# Altium PCB PCB.PcbDoc (part 2 of 2)
Units mm, origin at the board's own origin, x right, y up, seen from the top; angles counter-clockwise.
Board outline 82.77 x 70.07 mm, 4 copper layers (Top Layer, InternalPlane1, InternalPlane2, Bottom Layer), stack 1.963 mm thick; 175 components, 121 nets, 576 pads, 458 vias.
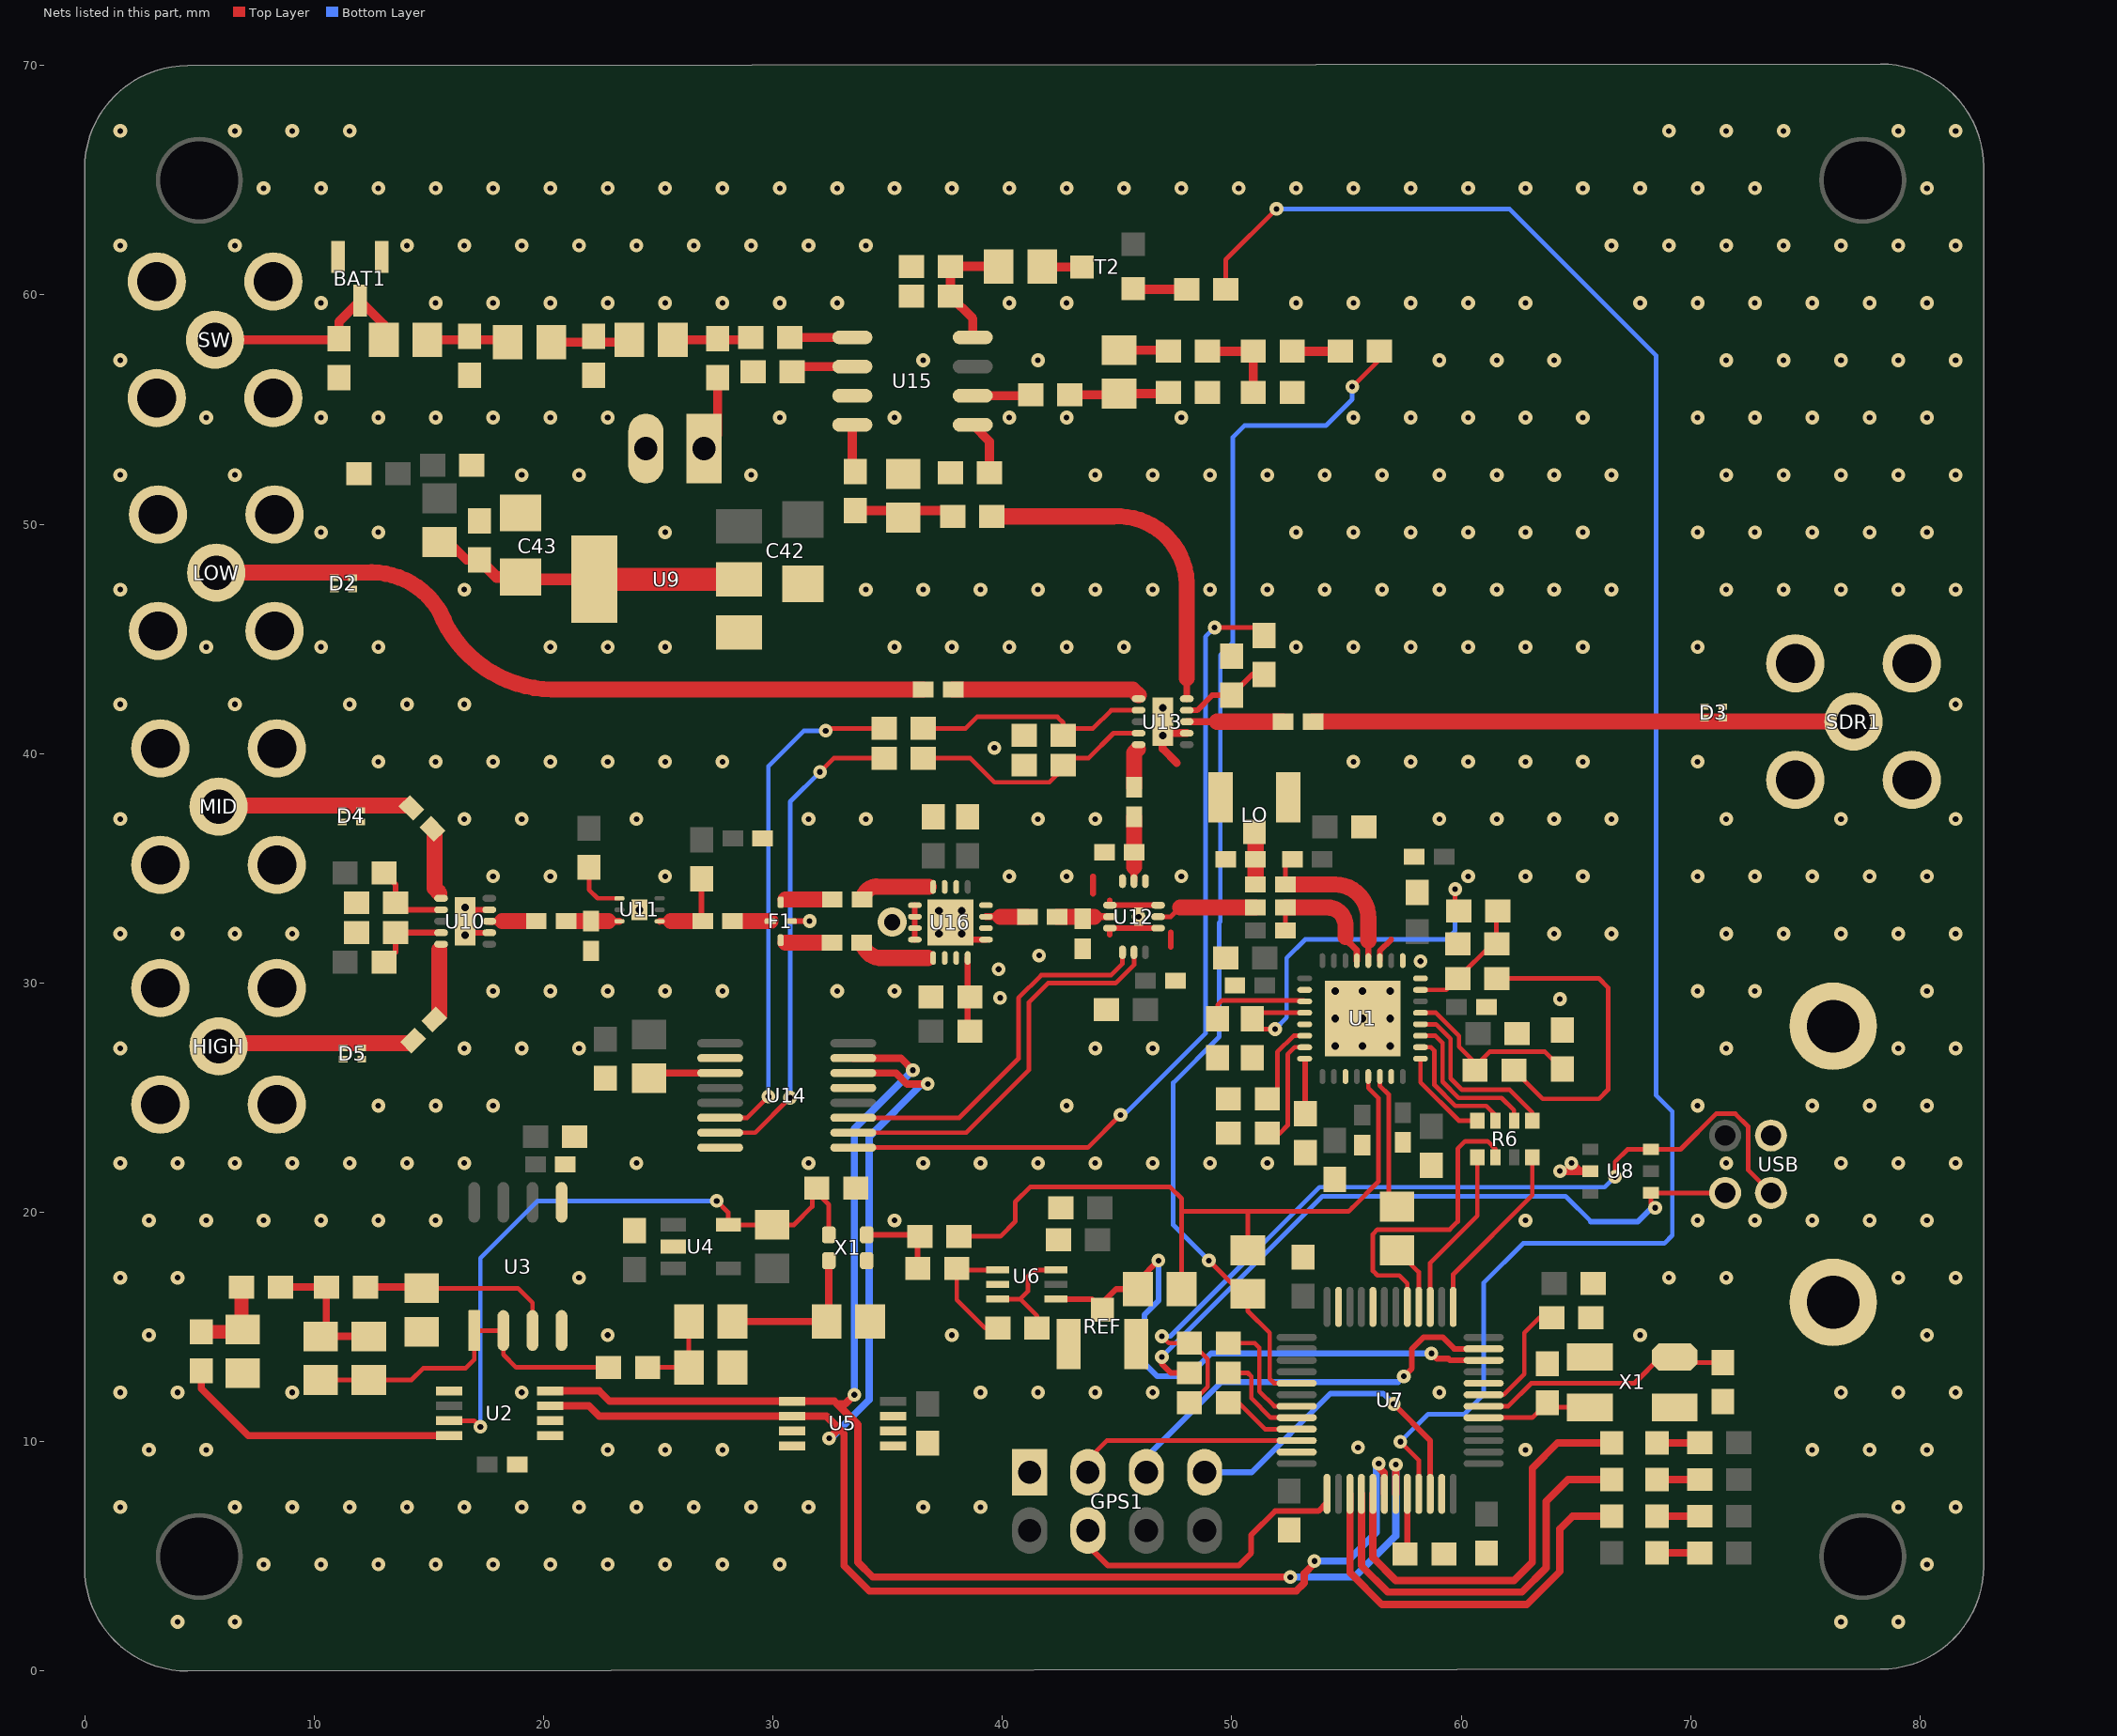
[diagram p4: the nets of this part, all layers, seen from the top]

## Via types
v1: diameter 0.6, hole 0.25, Top Layer to Bottom Layer, 439 vias
v2: diameter 0.66, hole 0.33, Top Layer to Bottom Layer, tented top, 18 vias
v3: diameter 1.27, hole 0.711, Top Layer to Bottom Layer, 1 vias

## Nets (pads, with @x,y where several pads share a name; then routed paths per layer and width w, separated by ;. In a path a pad name is that pad's centre, name@x,y a point inside that pad or via, vN(x,y) a via of type N, cw(c..) or ccw(c..) an arc to the next point about the centre after c; other vN are vias at no path point) (continued)
GND: BAT1.1 BAT1.2 C1.1 C2.1 C3.1 C4.1 C5.1 C6.1 C7.1 C8.1 C9.1 C10.1 C11.1 C12.1 C13.1 C14.1 C15.1 C18.1 C20.1 C22.1 C23.1 C25.1 C26.1 C27.1 C28.1 C29.1 C31.1 C32.1 C33.1 C35.1 C36.1 C37.1 C38.1 C39.1 C40.1 C41.1 C42.2 C43.2 C44.1 C45.1 C47.1 C49.1 C50.1 C51.1 C54.1 C60.1 C61.1 C62.1 C64.1 C65.1 C68.1 C69.2 C70.1 C71.1 C72.1 C73.1 C74.1 C78.1 C79.1 C80.2 C82.1 C85.1 C86.1 D2.1 D2.2 D3.1 D3.2 D4.1 D4.2 D5.1 D5.2 F1.4 GPS1.1 HIGH.2 HIGH.3 HIGH.4 HIGH.5 L9.1 LO.0 LOW.2 LOW.3 LOW.4 LOW.5 MID.2 MID.3 MID.4 MID.5 R1.1 R9.1 R23.1 R35.1 R37.2 R38.2 R39.1 REF.0 SDR1.2 SDR1.3 SDR1.4 SDR1.5 SW.2 SW.3 SW.4 SW.5 TERM1.2 U1.8 U1.9 U1.11 U1.18 U1.21 U1.27 U1.31 U1.33 U2.1 U2.2 U2.5 U3.4 U3.5 U4.2 U5.3 U5.4 U5.5 U5.6 U5.7 U6.2 U7.8 U7.20 U7.23 U7.35 U7.47 U8.2 U9.1 U10.7 U10.9 U10.11 U11.7 U12.1 U12.3 U12.4 U12.6 U12.10 U12.12 U12.13 U13.7 U13.11 U14.2 U14.8 U14.13 U15.3 U16.1 U16.2 U16.4 U16.6 U16.7 U16.9 U16.10 U16.11 U16.12 U16.14 U16.15 U16.17 USB.4 USB.5 USB.6 X1.2 X1.4@69.3,11.5 | length 18.3
  Top Layer w0.25: U10.11@16.586,32.692 17.086,33.192 U10.9@17.636,33.192 ; 17.086,32.192 U10.7@17.636,32.192 ; F1.4@30.786,32.692 31.592,32.692 v1(31.6,32.7) ; U16.12@36.186,31.892 U16.11@36.186,32.392 U16.10@36.186,32.892 U16.9@36.186,33.392 ; U16.17@38.486,31.892 U16.1@39.286,31.892 ; 43.95,33.9 43.95,34.65 ; 44.686,32.114 U12.6@44.686,32.392 U12.10@46.786,32.392 ; 44.686,33.6 U12.4@44.686,33.392 U12.12@46.786,33.392 ; 47.342,31.581 47.342,32.208 ; U1.11@56.45,30.975 56.45,31.4 56.95,31.9
  Top Layer w0.35: v2(46.986,41.992) U13.11@46.986,41.392 ; 47.6,39.6 46.986,40.214 v2(46.986,40.792) U13.11@46.986,41.392 ; U13.7@48.036,40.892 47.486,40.892 U13.11@46.986,41.392 ; v1(64.3,21.8) U8.2@65.625,21.8 65.15,21.8 v1(64.8,22.15)
  other v1: 4.05,2.15 6.55,2.15 76.55,2.15 79.05,2.15 7.8,4.65 10.3,4.65 12.8,4.65 15.3,4.65 17.8,4.65 20.3,4.65 22.8,4.65 25.3,4.65 27.8,4.65 30.3,4.65 80.3,4.65 1.55,7.15 6.55,7.15 9.05,7.15 11.55,7.15 14.05,7.15 16.55,7.15 19.05,7.15 21.55,7.15 24.05,7.15 26.55,7.15 29.05,7.15 31.55,7.15 36.55,7.15 39.05,7.15 79.05,7.15 81.55,7.15 2.8,9.65 5.3,9.65 22.8,9.65 25.3,9.65 27.8,9.65 62.8,9.65 75.3,9.65 77.8,9.65 80.3,9.65 55.5,9.75 1.55,12.15 4.05,12.15 9.05,12.15 19.05,12.15 39.05,12.15 41.55,12.15 44.05,12.15 46.55,12.15 59.05,12.15 76.55,12.15 79.05,12.15 81.55,12.15 2.8,14.65 22.8,14.65 37.8,14.65 67.8,14.65 80.3,14.65 1.55,17.15 4.05,17.15 21.55,17.15 69.05,17.15 71.55,17.15 79.05,17.15 81.55,17.15 2.8,19.65 5.3,19.65 7.8,19.65 10.3,19.65 12.8,19.65 15.3,19.65 35.3,19.65 62.8,19.65 70.3,19.65 72.8,19.65 75.3,19.65 77.8,19.65 80.3,19.65 1.55,22.15 4.05,22.15 6.55,22.15 9.05,22.15 11.55,22.15 14.05,22.15 16.55,22.15 24.05,22.15 31.55,22.15 36.55,22.15 39.05,22.15 41.55,22.15 44.05,22.15 46.55,22.15 49.05,22.15 51.55,22.15 71.55,22.15 76.55,22.15 79.05,22.15 81.55,22.15 12.8,24.65 15.3,24.65 17.8,24.65 42.8,24.65 70.3,24.65 75.3,24.65 77.8,24.65 80.3,24.65 1.55,27.15 16.55,27.15 19.05,27.15 21.55,27.15 44.05,27.15 46.55,27.15 71.55,27.15 79.05,27.15 81.55,27.15 64.3,29.3 39.9,29.35 17.8,29.65 20.3,29.65 22.8,29.65 25.3,29.65 27.8,29.65 32.8,29.65 35.3,29.65 70.3,29.65 72.8,29.65 80.3,29.65 39.836,30.6 58.225,30.95 41.6,31.2 1.55,32.15 4.05,32.15 6.55,32.15 9.05,32.15 64.05,32.15 66.55,32.15 71.55,32.15 74.05,32.15 76.55,32.15 79.05,32.15 81.55,32.15 45.936,32.892 17.8,34.65 20.3,34.65 25.3,34.65 40.3,34.65 42.8,34.65 47.8,34.65 60.3,34.65 62.8,34.65 65.3,34.65 70.3,34.65 72.8,34.65 75.3,34.65 77.8,34.65 80.3,34.65 1.55,37.15 16.55,37.15 19.05,37.15 24.05,37.15 31.55,37.15 34.05,37.15 41.55,37.15 44.05,37.15 59.05,37.15 61.55,37.15 64.05,37.15 66.55,37.15 71.55,37.15 76.55,37.15 81.55,37.15 12.8,39.65 15.3,39.65 17.8,39.65 20.3,39.65 22.8,39.65 25.3,39.65 27.8,39.65 55.3,39.65 57.8,39.65 60.3,39.65 62.8,39.65 65.3,39.65 70.3,39.65 39.65,40.25 1.55,42.15 6.55,42.15 11.55,42.15 14.05,42.15 16.55,42.15 81.55,42.15 5.3,44.65 10.3,44.65 12.8,44.65 20.3,44.65 22.8,44.65 25.3,44.65 35.3,44.65 37.8,44.65 40.3,44.65 42.8,44.65 45.3,44.65 52.8,44.65 55.3,44.65 57.8,44.65 60.3,44.65 62.8,44.65 65.3,44.65 70.3,44.65 1.55,47.15 16.55,47.15 34.05,47.15 36.55,47.15 39.05,47.15 41.55,47.15 44.05,47.15 46.55,47.15 49.05,47.15 51.55,47.15 54.05,47.15 56.55,47.15 59.05,47.15 61.55,47.15 64.05,47.15 66.55,47.15 71.55,47.15 74.05,47.15 76.55,47.15 79.05,47.15 81.55,47.15 10.3,49.65 12.8,49.65 25.3,49.65 52.8,49.65 55.3,49.65 57.8,49.65 60.3,49.65 62.8,49.65 65.3,49.65 70.3,49.65 72.8,49.65 75.3,49.65 77.8,49.65 80.3,49.65 1.55,52.15 6.55,52.15 19.05,52.15 21.55,52.15 29.05,52.15 44.05,52.15 46.55,52.15 49.05,52.15 51.55,52.15 54.05,52.15 56.55,52.15 59.05,52.15 61.55,52.15 64.05,52.15 66.55,52.15 71.55,52.15 74.05,52.15 76.55,52.15 79.05,52.15 81.55,52.15 5.3,54.65 10.3,54.65 12.8,54.65 15.3,54.65 17.8,54.65 20.3,54.65 22.8,54.65 30.3,54.65 35.3,54.65 40.3,54.65 42.8,54.65 47.8,54.65 55.3,54.65 57.8,54.65 60.3,54.65 62.8,54.65 65.3,54.65 70.3,54.65 72.8,54.65 75.3,54.65 77.8,54.65 80.3,54.65 1.55,57.15 36.55,57.15 41.55,57.15 59.05,57.15 61.55,57.15 64.05,57.15 71.55,57.15 74.05,57.15 76.55,57.15 79.05,57.15 81.55,57.15 10.3,59.65 15.3,59.65 17.8,59.65 20.3,59.65 22.8,59.65 25.3,59.65 27.8,59.65 30.3,59.65 32.8,59.65 40.3,59.65 42.8,59.65 52.8,59.65 55.3,59.65 57.8,59.65 60.3,59.65 62.8,59.65 67.8,59.65 70.3,59.65 72.8,59.65 75.3,59.65 77.8,59.65 80.3,59.65 1.55,62.15 6.55,62.15 14.05,62.15 16.55,62.15 19.05,62.15 21.55,62.15 24.05,62.15 26.55,62.15 29.05,62.15 31.55,62.15 34.05,62.15 66.55,62.15 69.05,62.15 71.55,62.15 74.05,62.15 76.55,62.15 79.05,62.15 81.55,62.15 7.8,64.65 10.3,64.65 12.8,64.65 15.3,64.65 17.8,64.65 20.3,64.65 22.8,64.65 25.3,64.65 27.8,64.65 30.3,64.65 32.8,64.65 35.3,64.65 37.8,64.65 40.3,64.65 42.8,64.65 45.3,64.65 47.8,64.65 50.3,64.65 52.8,64.65 55.3,64.65 57.8,64.65 60.3,64.65 62.8,64.65 65.3,64.65 67.8,64.65 70.3,64.65 72.8,64.65 80.3,64.65 1.55,67.15 6.55,67.15 9.05,67.15 11.55,67.15 69.05,67.15 71.55,67.15 74.05,67.15 79.05,67.15 81.55,67.15
  other v2: 54.5,27.25 55.7,27.25 56.9,27.25 54.5,28.45 55.7,28.45 56.9,28.45 54.5,29.65 55.7,29.65 56.9,29.65 16.586,32.092 37.236,32.142 38.236,32.142 37.236,33.142 38.236,33.142 24.186,33.192 16.586,33.292
  other v3: 35.2,32.65
GPS_RST: GPS1.7 U7.46 | length 14.4
  Top Layer w0.25: v1(57.05,11.65) 58.65,10.05 U7.46@58.65,7.725
  Bottom Layer w0.25: GPS1.7@48.81,8.67 50.87,8.67 54.3,12.1 56.6,12.1 v1(57.05,11.65)
LO+: C16.2 U12.11 | length 4.4
  Top Layer w0.2: U12.11@46.786,32.892 47.342,32.892 47.75,33.3
  Top Layer w0.7: 47.75,33.3 51.028,33.3 C16.2@51.036,33.292
LO-: C17.2 LO.1 R9.2 | length 2.3
  Top Layer w0.7: LO.1@50.986,36.59 51.036,36.54 C17.2@51.036,34.292
MIX_EN: U12.7 U14.11 | length 16.6
  Top Layer w0.2: U14.11@33.5,24.125 38.125,24.125 40.7,26.7 40.7,29.35 41.692,30.342 44.736,30.342 45.236,30.842 U12.7@45.236,31.342
MIX_X2: U12.8 U14.10 | length 17.5
  Top Layer w0.2: U14.10@33.5,23.475 38.425,23.475 41.15,26.2 41.15,29.15 41.992,29.992 44.936,29.992 45.736,30.792 U12.8@45.736,31.342
MOSI: R6.3 U7.17 | length 13.7
  Top Layer w0.2: U7.17@57.65,15.875 57.65,16.9 57.3,17.25 56.35,17.25 56.15,17.45 56.15,19.054 56.346,19.25 59.5,19.25 59.85,19.6 59.85,22.778 60.172,23.1 61.15,23.1 61.5,22.75 R6.3@61.5,22.4
MUXOUT: R3.1 U7.16 | length 2.9
  Top Layer w0.2: R3.1@57.2,18.35 58.15,17.4 U7.16@58.15,15.875
NetBAT1_3: BAT1.3 L6.2 R35.2 SW.1 | length 9.5
  Top Layer w0.4: SW.1@5.686,58.042 R35.2@11.036,58.042 ; R35.2@11.086,58.092 11.086,58.836 BAT1.3@12,59.75 13.036,58.714 L6.2@13.036,58.042
NetC7_2: C7.2 U1.23 | length 5
  Top Layer w0.2: C7.2@51.55,23.45 52.094,23.45 52.436,23.792 52.436,26.892 52.744,27.2 U1.23@53.175,27.2
NetC14_2: C14.2 U1.19 | length 4.5
  Top Layer w0.2: C14.2@49.386,28.442 49.386,29.042 49.586,29.242 53.133,29.242 U1.19@53.175,29.2
NetC15_2: C15.2 U1.24 | length 2.4
  Top Layer w0.25: U1.24@53.175,26.7 53.2,26.675 C15.2@53.2,24.3
NetC16_1: C16.1 R4.1 U1.13 | length 5.8
  Top Layer w0.2: R4.1@52.336,32.292 C16.1@52.336,33.292
  Top Layer w0.3: 54.95,32 54.95,31.931 55.45,31.431 U1.13@55.45,30.975
  Top Layer w0.7: C16.1@52.336,33.292 54.15,33.292 cw(c54.179,32.521) 54.95,32.55 54.95,32
NetC17_1: C17.1 R5.1 U1.12 | length 7.3
  Top Layer w0.2: C17.1@52.336,34.292 52.336,35.092 R5.1@52.636,35.392
  Top Layer w0.25: U1.12@55.95,31.175 55.95,31.85
  Top Layer w0.7: C17.1@52.336,34.292 54.5,34.292 ; 54.495,34.292 cw(c54.5,32.842) 55.95,32.847 ; 55.95,31.85 55.95,32.842
NetC18_2: C18.2 C19.2 R10.1 U1.7 | length 5.7
  Top Layer w0.2: U1.7@58.225,29.7 59.35,29.7 C19.2@59.85,30.2 61.35,31.7 C18.2@61.55,31.7 61.536,31.714 R10.1@61.536,33.192
NetC19_1: C19.1 R11.2 | length 14.2
  Top Layer w0.2: C19.1@61.55,30.2 66,30.2 66.4,29.8 66.4,25.35 66,24.95 63.55,24.95 R11.2@62.3,26.2
NetC21_1: C21.1 C24.1 R13.1 U3.1 U3.2 | length 15.5
  Top Layer w0.2: C21.1@10.286,12.692 C24.1@12.386,12.692 14.242,12.692 14.75,13.2 16.6,13.2 16.981,13.581 U3.1@16.981,14.848 U3.2@18.251,14.848 18.251,13.799 18.808,13.242 R13.1@22.836,13.242
NetC21_2: C21.2 C24.2 R15.2 R16.1 | length 6.4
  Top Layer w0.32: R15.2@8.536,16.742 R16.1@10.536,16.742 10.536,14.842 C21.2@10.286,14.592 C24.2@12.386,14.592
NetC25_2: C25.2 L1.1 R13.2 | length 3.8
  Top Layer w0.2: R13.2@24.536,13.242 C25.2@26.336,13.242 L1.1@26.336,15.242
NetC26_2: C26.2 L1.2 X1.1@32.436,17.892 | length 6.8
  Top Layer w0.32: L1.2@28.236,15.242 C26.2@32.336,15.242 32.436,15.342 X1.1@32.436,17.892
NetC27_2: C27.2 R14.2 R15.1 | length 3.7
  Top Layer w0.6: R14.2@5.086,14.792 6.786,14.792 6.836,14.842 R15.1@6.836,16.742
NetC28_2: C28.2 R16.2 U3.3 | length 8.8
  Top Layer w0.2: C28.2@14.686,16.692 18.886,16.692 19.521,16.057 U3.3@19.521,14.848
  Top Layer w0.32: R16.2@12.236,16.742 14.636,16.742 C28.2@14.686,16.692
NetC30_1: C30.1 R17.1 U6.1 | length 5.5
  Top Layer w0.2: U6.1@39.791,17.492 38.076,17.492 C30.1@38.011,17.557 38.011,16.19 39.244,14.957 R17.1@39.811,14.957
NetC30_2: C30.2 C34.1 X1.3@34.086,19.022 | length 3.7
  Top Layer w0.25: X1.3@34.086,19.022 C34.1@36.346,19.022 ; C30.2@36.311,17.557 C34.1@36.311,18.857 ; C34.1@36.311,18.957 C34.1@36.411,18.957
NetC39_2: C39.2 U7.5 X1.3@65.6,11.5 | length 4.8
  Top Layer w0.2: U7.5@60.975,11.05 63.1,11.05 63.55,11.5 X1.3@65.6,11.5
NetC40_2: C40.2 U7.6 X1.1@69.3,13.7 | length 10.8
  Top Layer w0.2: U7.6@60.975,11.55 62.05,11.55 63.05,12.55 67.55,12.55 X1.1@68.7,13.7 ; X1.1@69.3,13.7 69.55,13.45 C40.2@71.4,13.45
NetC41_2: C41.2 U7.7 | length 5.4
  Top Layer w0.2: U7.7@60.975,12.05 61.85,12.05 62.75,12.95 62.75,14.75 63.4,15.4 C41.2@63.95,15.4
NetC43_1: C43.1 C44.2 L2.1 U9.2 U9.4 | length 13.7
  Top Layer w0.4: L2.1@15.475,49.225 15.875,49.225 16.65,48.45 C44.2@17.2,48.45
  Top Layer w0.5: C44.2@17.2,48.45 17.95,47.7 C43.1@19,47.7 19.1,47.6 U9.4@22.219,47.6
  Top Layer w1: U9.4@22.219,47.6 U9.2@28.518,47.6
NetC52_1: C52.1 U10.5 | length 2.9
  Top Layer w0.7: C52.1@15.45,28.6 15.45,31.456
NetC52_2: C52.2 D5.3 D5.4 HIGH.1 | length 8.3
  Top Layer w0.7: HIGH.1@5.836,27.242 5.976,27.382 C52.2@14.046,27.382
NetC53_1: C53.1 F1.1 | length 2
  Top Layer w0.7: 30.55,33.642 C53.1@32.586,33.642
NetC53_2: C53.2 U16.8 | length 3.1
  Top Layer w0.7: C53.2@33.942,33.708 cw(c34.517,33.625) 34.6,34.2 36.8,34.2
NetC55_1: C55.1 U10.8 | length 2.1
  Top Layer w0.3: U10.8@17.636,32.692 18.205,32.692
  Top Layer w0.7: 18.205,32.692 C55.1@19.686,32.692
NetC55_2: C55.2 C60.2 U11.3 | length 2.3
  Top Layer w0.3: 22.836,32.7 22.844,32.692 U11.3@23.311,32.692
  Top Layer w0.7: C55.2@20.986,32.692 20.994,32.7 22.836,32.7
NetC56_1: C56.1 L4.1 U11.4 | length 3.7
  Top Layer w0.25: L4.1@26.886,34.542 26.886,32.742 C56.1@26.936,32.692
  Top Layer w0.3: U11.4@25.061,32.692 25.55,32.7
  Top Layer w0.7: 25.55,32.7 C56.1@26.936,32.692
NetC56_2: C56.2 F1.2 | length 1.7
  Top Layer w0.7: C56.2@28.236,32.692 F1.2@29.886,32.692
NetC57_1: C57.1 F1.3 | length 2
  Top Layer w0.7: 30.55,31.75 C57.1@32.536,31.75
NetC57_2: C57.2 U16.13 | length 3.4
  Top Layer w0.7: C57.2@33.897,31.699 ccw(c34.744,31.978) 34.884,31.098 ; 34.65,31.092 36.75,31.092
NetC58_1: C58.1 U16.3 | length 1.8
  Top Layer w0.3: U16.3@39.286,32.892 39.908,32.892
  Top Layer w0.7: 39.908,32.892 C58.1@41.086,32.892
NetC58_2: C58.2 C62.2 U12.5 | length 2.3
  Top Layer w0.3: 44,32.892 U12.5@44.686,32.892
  Top Layer w0.7: C58.2@42.386,32.892 44,32.892
NetC59_1: C59.1 C61.2 U12.2 | length 2.8
  Top Layer w0.3: U12.2@45.736,34.442 45.736,35.064
  Top Layer w0.7: 45.736,35.064 C59.1@45.736,37.242
NetC59_2: C59.2 U13.5 | length 1.7
  Top Layer w0.7: C59.2@45.736,38.542 45.736,40.036 45.9,40.2
NetC63_1: C63.1 U10.1 | length 2.7
  Top Layer w0.7: C63.1@15.25,36.55 15.25,34.128 15.464,33.914
NetC63_2: C63.2 D4.3 D4.4 MID.1 | length 8.3
  Top Layer w0.7: MID.1@5.836,37.692 5.876,37.732 C63.2@14.15,37.732
NetC64_2: C64.2 R8.2 U10.2 | length 3.6
  Top Layer w0.25: R8.2@13.05,34.8 13.55,34.3 C64.2@13.55,33.5 13.858,33.192 U10.2@15.536,33.192
NetC65_2: C65.2 R27.1 U10.4 | length 3.7
  Top Layer w0.25: R27.1@12.85,30.9 13.1,30.9 13.55,31.35 C65.2@13.55,32.2 15.528,32.2 U10.4@15.536,32.192
NetC66_1: C66.1 D2.3 D2.4 LOW.1 | length 33.6
  Top Layer w0.7: LOW.1@5.736,47.892 12.208,47.892 cw(c12.483,44.425) 15.657,45.848 ; 15.503,46.128 ccw(c20.475,48.167) 20.75,42.8 ; 20.35,42.8 C66.1@36.55,42.8
NetC66_2: C66.2 U13.1 | length 8.2
  Top Layer w0.7: C66.2@37.85,42.8 45.678,42.8 45.936,42.542
NetC67_1: C67.1 U13.8 | length 4.2
  Top Layer w0.3: U13.8@48.036,41.392 49.358,41.392
  Top Layer w0.7: 49.358,41.392 C67.1@52.236,41.392
NetC67_2: C67.2 D3.3 D3.4 SDR1.1 | length 24.4
  Top Layer w0.7: C67.2@53.536,41.392 53.544,41.4 SDR1.1@77.925,41.4
NetC70_2: C70.2 R28.2 U13.4 | length 11.2
  Top Layer w0.2: R28.2@36.55,39.8 38.6,39.8 39.65,38.75 42.05,38.75 42.65,39.35 42.65,39.792 42.65,39.8 43.75,39.8 44.842,40.892 U13.4@45.936,40.892
  Top Layer w0.25: C70.2@42.4,39.792 C70.2@42.65,39.792
NetC71_2: C71.2 R30.2 U13.2 | length 10.3
  Top Layer w0.2: R30.2@36.55,41.1 38.4,41.1 38.9,41.6 42.4,41.6 42.65,41.35 42.65,41.1 43.95,41.1 44.742,41.892 U13.2@45.936,41.892
NetC72_2: C72.2 R32.2 U13.9 | length 4
  Top Layer w0.25: U13.9@48.036,41.892 48.492,41.892 49.15,42.55 C72.2@50,42.55 50.9,43.45 R32.2@51.4,43.45
NetC73_2: C73.2 C74.2 L5.1 U15.8 | length 5.6
  Top Layer w0.4: U15.8@38.711,58.147 38.711,58.967 C73.2@37.736,59.942 C74.2@37.736,61.242 L5.1@39.836,61.242
NetC75_1: C75.1 U15.1 | length 2.7
  Top Layer w0.4: C75.1@30.736,58.142 33.456,58.142 U15.1@33.461,58.147
NetC75_2: C75.2 L8.1 R34.2 | length 3.4
  Top Layer w0.4: L8.1@25.636,58.042 28.936,58.042 C75.2@29.036,58.142
NetC76_1: C76.1 U15.4 | length 2.1
  Top Layer w0.4: U15.4@33.461,54.337 33.461,52.417 C76.1@33.586,52.292
NetC76_2: C76.2 C77.1 L9.2 | length 4.4
  Top Layer w0.4: C76.2@33.586,50.592 37.586,50.592 C77.1@37.836,50.342
NetC77_2: C77.2 U13.10 | length 15.2
  Top Layer w0.3: U13.10@48.036,42.392 48.036,43.286
  Top Layer w0.7: C77.2@39.536,50.342 44.842,50.342 cw(c45.018,47.324) 48.036,47.5 48.036,43.286
NetC78_2: C78.2 L6.1 L7.2 | length 3.5
  Top Layer w0.4: L6.1@14.936,58.042 18.336,58.042 L7.2@18.436,57.942
NetC79_2: C79.2 L7.1 L8.2 | length 3.4
  Top Layer w0.4: L7.1@20.336,57.942 23.636,57.942 L8.2@23.736,58.042
NetC80_1: C80.1 U15.2 | length 2.7
  Top Layer w0.4: C80.1@30.836,56.642 31.071,56.877 U15.2@33.461,56.877
NetC81_1: C81.1 U15.6 | length 2.5
  Top Layer w0.4: U15.6@38.711,55.607 41.201,55.607 C81.1@41.236,55.642
NetC81_2: C81.2 L10.1 R38.1 | length 4.3
  Top Layer w0.4: C81.2@42.936,55.642 45.036,55.642 L10.1@45.086,55.692 47.186,55.692 R38.1@47.236,55.742
NetC82_2: C82.2 U15.5 | length 2.4
  Top Layer w0.4: U15.5@38.711,54.337 39.436,53.612 C82.2@39.436,52.242
NetC83_1: C83.1 R36.2 | length 2.1
  Top Layer w0.4: R36.2@52.636,57.542 C83.1@54.736,57.542
NetC83_2: C83.2 R2.2 U7.29 | length 53.4
  Top Layer w0.2: v1(49,17.9) 50.45,16.45 R2.2@50.7,16.45 50.7,15.7 51.65,14.75 51.65,12.75 51.85,12.55 U7.29@52.825,12.55 ; v1(55.25,56) C83.2@56.436,57.186
  Bottom Layer w0.2: v1(49,17.9) 47.45,19.45 47.45,25.65 49.45,27.65 49.45,32.628 49.5,32.678 49.5,44.3 50.05,44.85 50.05,53.8 50.55,54.3 54.1,54.3 55.25,55.45 v1(55.25,56)
NetC84_1: C84.1 L10.2 | length 2.2
  Top Layer w0.4: L10.2@45.086,57.592 47.186,57.592 C84.1@47.236,57.542
NetC84_2: C84.2 R36.1 R37.1 | length 3.8
  Top Layer w0.4: C84.2@48.936,57.542 R36.1@50.936,57.542 R37.1@50.936,55.742
NetC86_2: C86.2 R7.2 U16.16 | length 3.2
  Top Layer w0.25: U16.16@38.486,31.092 38.486,27.992 R7.2@38.586,27.892
NetCLK_1: CLK.1 R19.1 | length 1.9
  Top Layer w0.32: CLK.1@68.537,5.154 R19.1@70.396,5.154
NetDATA1_2: R25.2 U8.4 USB.2@71.5,20.85 | length 30.7
  Top Layer w0.2: v1(68.45,20.2) 68.275,20.375 U8.4@68.275,20.85 USB.2@71.5,20.85
  Top Layer w0.25: v1(46.95,13.7) 46.95,13.4 47.35,13 R25.2@48.15,13
  Bottom Layer w0.2: v1(46.95,13.7) 53.95,20.7 64.55,20.7 65.65,19.6
  Bottom Layer w0.25: 65.65,19.6 67.7,19.6 v1@68.4,20.3
NetDATA1_3: R24.2 R26.2 U8.6 USB.3 | length 38.2
  Top Layer w0.2: v1(46.95,14.6) 47.25,14.3 R24.2@48.15,14.3 48.254,14.3 48.95,13.604 48.95,12.396 48.254,11.7 R26.2@48.15,11.7 ; v1(66.7,21.55) 66.7,22.2 67.25,22.75 U8.6@68.275,22.75 69.559,22.75 71.107,24.298 71.952,24.298 72.5,23.75 72.5,21.85 USB.3@73.5,20.85
  Bottom Layer w0.2: v1(46.95,14.6) 47.32,14.6 53.82,21.1 66.25,21.1 v1(66.7,21.55)
NetL5_2: L5.2 T2.3 | length 1.7
  Top Layer w0.4: L5.2@41.736,61.242 41.761,61.217 T2.3@43.468,61.217
NetLOCK_1: LOCK.1 R21.1 | length 1.9
  Top Layer w0.32: LOCK.1@68.537,8.354 R21.1@70.396,8.354
NetLOCK_2: LOCK.2 U7.40 | length 18.2
  Top Layer w0.32: U7.40@55.65,7.725 55.65,4.6 56.8,3.45 62.65,3.45 63.7,4.5 63.7,7.4 64.654,8.354 LOCK.2@66.555,8.354
NetMIX_1: MIX.1 R22.1 | length 1.9
  Top Layer w0.32: MIX.1@68.537,9.954 R22.1@70.396,9.954
NetMIX_2: MIX.2 U7.41 | length 18.5
  Top Layer w0.32: U7.41@56.15,7.725 56.15,4.95 57.15,3.95 62.3,3.95 63.096,4.746 63.096,8.846 64.204,9.954 MIX.2@66.555,9.954
NetR1_2: R1.2 U1.22 | length 3.7
  Top Layer w0.2: R1.2@51.55,24.95 51.986,25.386 51.986,26.992 52.694,27.7 U1.22@53.175,27.7
NetR3_2: R3.2 U1.30 | length 6
  Top Layer w0.2: U1.30@56.45,25.925 56.45,25.528 56.836,25.142 56.836,20.614 R3.2@57.2,20.25
NetR6_2: R6.2 U1.1 | length 4.2
  Top Layer w0.2: U1.1@58.225,26.7 58.225,25.668 59.893,24 R6.2@60.7,24
NetR6_4: R6.4 U1.2 | length 5.6
  Top Layer w0.2: U1.2@58.225,27.2 58.678,27.2 58.836,27.042 58.836,25.552 59.746,24.642 61.087,24.642 61.5,24.229 R6.4@61.5,24
NetR6_6: R6.6 U1.3 | length 6.9
  Top Layer w0.2: U1.3@58.225,27.7 58.878,27.7 59.186,27.392 59.186,25.697 59.891,24.992 61.758,24.992 62.3,24.45 R6.6@62.3,24
NetR6_7: R6.7 U7.13 | length 8
  Top Layer w0.2: U7.13@59.65,15.875 59.65,17.3 63.1,20.75 R6.7@63.1,22.4
NetR6_8: R6.8 U1.4 | length 7.8
  Top Layer w0.2: U1.4@58.225,28.2 58.901,28.2 59.536,27.565 59.536,25.842 60.036,25.342 62.108,25.342 63.1,24.35 R6.8@63.1,24
NetR11_1: R11.1 R39.2 U1.5 | length 8.3
  Top Layer w0.2: U1.5@58.225,28.7 58.896,28.7 59.904,27.692 59.904,27.22 60.082,27.042 60.086,27.042 60.6,26.528 R11.1@60.6,26.364 ; R11.1@60.6,26.2 R11.1@60.6,26.364 ; R39.2@64.4,26.25 63.65,27 61.236,27 R11.1@60.6,26.364
NetR14_1: R14.1 U2.8 | length 12.4
  Top Layer w0.32: R14.1@5.086,13.092 5.086,12.314 7.134,10.266 U2.8@15.886,10.266
NetR17_2: R17.2 U6.3 U6.6 | length 5
  Top Layer w0.2: U6.3@39.791,16.222 40.776,16.222 ; R17.2@41.511,14.957 41.511,15.487 40.776,16.222 ; U6.6@42.331,17.492 41.396,17.492 41.111,17.207 41.111,16.557 40.776,16.222
NetR18_2: R18.2 REF.1 U6.4 U7.10 | length 25.9
  Top Layer w0.25: U6.4@42.331,16.222 43.899,16.222 44.21,15.91 44.957,16.657 R18.2@45.911,16.657 45.911,17.011 v1(46.8,17.9) ; v1(58.7,13.85) 58.925,13.625 59.438,13.625 59.513,13.55 U7.10@60.975,13.55
  Bottom Layer w0.25: v1(46.8,17.9) 46.8,16.15 46.196,15.546 46.196,13.404 46.75,12.85 48.1,12.85 49.1,13.85 v1(58.7,13.85)
NetR20_1: R20.1 USB.1@68.537,6.754 | length 1.9
  Top Layer w0.32: USB.1@68.537,6.754 R20.1@70.396,6.754
NetR23_2: R23.2 U7.44 | length 2.7
  Top Layer w0.25: R23.2@57.55,5.1 57.65,5.2 U7.44@57.65,7.725
NetR29_1: R29.1 U11.1 | length 2.5
  Top Layer w0.2: R29.1@21.986,35.042 21.986,34.064 22.358,33.692 U11.1@23.311,33.692
NetR31_2: R31.2 U14.3 | length 3.2
  Top Layer w0.3: R31.2@24.6,25.85 24.825,26.075 U14.3@27.7,26.075
NetR33_1: R33.1 U7.45 | length 83.3
  Top Layer w0.2: R33.1@49.736,60.242 49.736,61.536 v1(51.95,63.75) ; v1(57.35,10) 58.15,9.2 U7.45@58.15,7.725
  Bottom Layer w0.2: v1(51.95,63.75) 62.1,63.75 68.5,57.35 68.5,25.1 69.2,24.4 69.2,19 68.85,18.65 62.7,18.65 60.975,16.925 60.975,12.05 60.125,11.2 58.55,11.2 v1(57.35,10)
NetR33_2: R33.2 T2.1 | length 2.3
  Top Layer w0.4: T2.1@45.704,60.277 45.738,60.242 R33.2@48.036,60.242
NetR34_1: R34.1 TERM1.1 | length 3.3
  Top Layer w0.4: TERM1.1@27,53.3 27.586,53.886 R34.1@27.586,56.392
NetU7_39: U7.39 USB.2@66.555,6.754 | length 18.1
  Top Layer w0.32: U7.39@55.15,7.725 55.15,4.3 56.55,2.9 62.85,2.9 64.3,4.35 64.3,6.2 64.854,6.754 USB.2@66.555,6.754
PPS_IN: GPS1.5 U7.11 | length 18.2
  Top Layer w0.25: v1(57.5,12.85) 57.85,13.2 57.85,14.05 58.35,14.55 59.2,14.55 59.7,14.05 U7.11@60.975,14.05
  Bottom Layer w0.25: GPS1.5@46.27,8.67 46.27,9.32 49.55,12.6 57.25,12.6 v1(57.5,12.85)
REF_PLL: C34.2 R2.1 R18.1 U1.29 | length 30.8
  Top Layer w0.2: C34.2@38.111,18.957 39.911,18.957 40.561,19.607 40.561,20.457 41.211,21.107 47.311,21.107 47.811,20.607 47.811,20.1 ; R18.1@47.811,16.657 47.811,20.1 ; R2.1@50.7,18.35 50.7,20.038 ; U1.29@55.95,25.925 55.95,25.428 56.386,24.992 56.386,21.336 55.256,20.206 55.25,20.206 55.082,20.038 50.7,20.038 ; 47.811,20.1 47.873,20.038 50.7,20.038
REF_VCC: C35.2 R12.2 U2.7 U4.5 X1.4@32.436,19.022 | length 28.5
  Top Layer w0.2: U2.7@15.886,10.917 16.983,10.917 v1(17.25,10.65) ; v1(27.55,20.5) 28.05,20 28.05,19.468 U4.5@28.061,19.457 R12.2@29.961,19.457 30.916,19.457 31.711,20.252 31.711,21.057 32.436,20.332 X1.4@32.436,19.022
  Bottom Layer w0.2: v1(17.25,10.65) 17.25,18 19.75,20.5 v1(27.55,20.5)
SCK: R6.1 U7.15 | length 7.4
  Top Layer w0.2: U7.15@58.65,15.875 58.65,17.8 60.7,19.85 R6.1@60.7,22.4
SCL: U2.3 U5.2 U7.42 U14.14 | length 70
  Top Layer w0.32: U2.3@20.286,11.567 21.983,11.567 22.433,11.117 U5.2@30.836,11.117 32.333,11.117 32.8,10.65 ; v1(32.45,10.15) 32.8,10.5 32.8,10.65 ; U14.14@33.5,26.075 35.362,26.075 35.847,25.59 36.353,25.59 36.363,25.6 v1(36.75,25.6) ; v1(53.6,4.8) 53.6,4.7 53.16,4.26 53.16,3.847 52.803,3.49 34.21,3.49 33.1,4.6 33.1,10.35 32.8,10.65 ; v1(56.4,9.049) 56.4,8.887 56.65,8.637 U7.42@56.65,7.725
  Bottom Layer w0.32: v1(32.45,10.15) 32.513,10.15 34.2,11.837 34.2,23.3 36.5,25.6 v1(36.75,25.6) ; v1(53.6,4.8) 55.05,4.8 56.3,6.05 v1@56.3,9
SDA: U2.4 U5.1 U7.43 U14.15 | length 67.4
  Top Layer w0.32: U2.4@20.286,12.218 22.432,12.218 22.883,11.767 U5.1@30.836,11.767 32.683,11.767 32.8,11.65 ; U14.15@33.5,26.725 35.575,26.725 v1(36.1,26.2) ; v1(33.55,12.05) 33.15,11.65 32.8,11.65 ; v1(52.55,4.1) 34.35,4.1 33.7,4.75 33.7,10.75 32.8,11.65 ; U7.43@57.15,7.725 v1@57.15,8.799
  Bottom Layer w0.32: v1(33.55,12.05) 33.55,23.65 v1(36.1,26.2) ; v1(52.55,4.1) 55.35,4.1 57.15,5.9 v1@57.15,8.799
  other v1: 57.15,9
SW_BYPASS: R30.1 U14.6 | length 22.6
  Top Layer w0.2: U14.6@27.7,24.125 28.875,24.125 v1(29.8,25.05) ; v1(32.3,41) 32.4,41.1 R30.1@34.85,41.1
  Bottom Layer w0.2: v1(29.8,25.05) 29.8,39.45 31.35,41 v1(32.3,41)
SW_MIX: R28.1 U14.7 | length 21.5
  Top Layer w0.2: U14.7@27.7,23.475 29.225,23.475 v1(30.75,25) ; v1(32.05,39.2) 32.65,39.8 R28.1@34.85,39.8
  Bottom Layer w0.2: v1(30.75,25) 30.75,37.9 v1(32.05,39.2)
SW_SW: R32.1 U14.9 | length 37.6
  Top Layer w0.2: U14.9@33.5,22.825 43.725,22.825 v1(45.15,24.25) ; v1(49.25,45.5) 51.05,45.5 R32.1@51.4,45.15
  Bottom Layer w0.2: v1(45.15,24.25) 45.3,24.25 48.85,27.8 48.85,45.1 v1(49.25,45.5)
SWCLK: GPS1.4 U7.37 | length 13.4
  Top Layer w0.25: GPS1.4@43.73,6.13 43.73,5.47 44.6,4.6 50.3,4.6 50.85,5.15 50.85,5.939 51.886,6.975 53.775,6.975 54.15,7.35 U7.37@54.15,7.725
SWDIO: GPS1.3 U7.34 | length 10
  Top Layer w0.2: GPS1.3@43.73,8.67 43.73,9.23 44.55,10.05 U7.34@52.825,10.05
TUNE: C20.2 R10.2 U1.20 | length 17.4
  Top Layer w0.2: C20.2@50.886,28.442 51.336,27.992 v1(51.886,27.992) ; C20.2@50.95,28.55 51.1,28.7 U1.20@53.175,28.7 ; v1(59.736,34.092) 59.736,33.292 R10.2@59.886,33.142
  Bottom Layer w0.2: v1(51.886,27.992) 52.386,28.492 52.386,31.086 53.2,31.9 59.35,31.9 59.736,32.286 v1(59.736,34.092)
USB_D+: R26.1 U7.33 | length 3.5
  Top Layer w0.2: R26.1@49.85,11.7 50.3,11.7 51.45,10.55 U7.33@52.825,10.55
USB_D-: R25.1 U7.32 | length 4.3
  Top Layer w0.2: R25.1@49.85,13 50.7,13 50.85,12.85 50.85,11.9 51.7,11.05 U7.32@52.825,11.05
USB_EN: R24.1 U7.31 | length 5.2
  Top Layer w0.2: R24.1@49.85,14.3 51,14.3 51.2,14.1 51.2,12.2 51.85,11.55 U7.31@52.825,11.55
pads on no net: C42.0 C43.0 H1.0 H2.0 H3.0 H4.0 U1.14 U1.15 U1.25 U3.7 U4.1 U6.0 U7.2 U7.3 U7.4 U7.12 U7.18 U7.19 U7.25 U7.26 U7.27 U7.28 U7.30 U8.1 U8.3 U8.7 U10.3 U10.6 U10.10 U11.2 U11.5 U11.6 U13.3 U13.6 U15.7

## Polygon pours and split planes (outlines as drawn)
GND on Top Layer "GND" (solid, pour order 4): 82.95,70 82.95,-0.1 0,-0.1 0,70
GND on Bottom Layer "GND" (solid, pour order 3): 82.95,70 82.95,-0.1 0,-0.1 0,70
GND on InternalPlane1 (split plane): 78.529,69.551 78.789,69.525 79.047,69.483 79.301,69.424 79.551,69.348 79.796,69.256 80.033,69.148 80.264,69.025 80.486,68.887 80.698,68.735 80.9,68.569 81.091,68.391 81.269,68.2 81.435,67.998 81.587,67.786 81.725,67.564 81.848,67.333 81.956,67.096 82.048,66.851 82.124,66.601 82.183,66.347 82.225,66.089 82.251,65.829 82.259,65.584 82.258,65.568 82.258,4.582 82.259,4.566 82.251,4.321 82.225,4.061 82.183,3.803 82.124,3.549 82.048,3.299 81.956,3.054 81.848,2.817 81.725,2.586 81.587,2.364 81.435,2.152 81.269,1.95 81.091,1.76 80.9,1.581 80.698,1.415 80.486,1.263 80.264,1.125 80.033,1.002 79.796,0.894 79.551,0.802 79.301,0.726 79.047,0.667 78.789,0.625 78.529,0.599 78.283,0.591 78.268,0.592 78.267,0.592 4.499,0.51 4.484,0.509 4.239,0.517 3.979,0.543 3.721,0.585 3.467,0.644 3.217,0.72 2.972,0.812 2.735,0.92 2.504,1.043 2.282,1.181 2.07,1.333 1.868,1.499 1.678,1.677 1.499,1.868 1.333,2.07 1.181,2.282 1.043,2.504 0.92,2.735 0.812,2.972 0.72,3.217 0.644,3.467 0.585,3.721 0.543,3.979 0.517,4.239 0.509,4.484 0.51,4.5 0.51,65.5 0.509,65.516 0.517,65.761 0.543,66.021 0.585,66.279 0.644,66.533 0.72,66.783 0.812,67.028 0.92,67.265 1.043,67.496 1.181,67.718 1.333,67.93 1.499,68.132 1.678,68.323 1.868,68.501 2.07,68.667 2.282,68.819 2.504,68.957 2.735,69.08 2.972,69.188 3.217,69.28 3.467,69.356 3.721,69.415 3.979,69.457 4.239,69.483 4.485,69.491 4.5,69.49 78.269,69.558 78.284,69.559
3V3 on InternalPlane2 (split plane): 78.529,69.551 78.789,69.525 79.047,69.483 79.301,69.424 79.551,69.348 79.796,69.256 80.033,69.148 80.264,69.025 80.486,68.887 80.698,68.735 80.9,68.569 81.091,68.391 81.269,68.2 81.435,67.998 81.587,67.786 81.725,67.564 81.848,67.333 81.956,67.096 82.048,66.851 82.124,66.601 82.183,66.347 82.225,66.089 82.251,65.829 82.259,65.584 82.258,65.568 82.258,4.582 82.259,4.566 82.251,4.321 82.225,4.061 82.183,3.803 82.124,3.549 82.048,3.299 81.956,3.054 81.848,2.817 81.725,2.586 81.587,2.364 81.435,2.152 81.269,1.95 81.091,1.76 80.9,1.581 80.698,1.415 80.486,1.263 80.264,1.125 80.033,1.002 79.796,0.894 79.551,0.802 79.301,0.726 79.047,0.667 78.789,0.625 78.529,0.599 78.283,0.591 78.268,0.592 78.267,0.592 4.499,0.51 4.484,0.509 4.239,0.517 3.979,0.543 3.721,0.585 3.467,0.644 3.217,0.72 2.972,0.812 2.735,0.92 2.504,1.043 2.282,1.181 2.07,1.333 1.868,1.499 1.678,1.677 1.499,1.868 1.333,2.07 1.181,2.282 1.043,2.504 0.92,2.735 0.812,2.972 0.72,3.217 0.644,3.467 0.585,3.721 0.543,3.979 0.517,4.239 0.509,4.484 0.51,4.5 0.51,65.5 0.509,65.516 0.517,65.761 0.543,66.021 0.585,66.279 0.644,66.533 0.72,66.783 0.812,67.028 0.92,67.265 1.043,67.496 1.181,67.718 1.333,67.93 1.499,68.132 1.678,68.323 1.868,68.501 2.07,68.667 2.282,68.819 2.504,68.957 2.735,69.08 2.972,69.188 3.217,69.28 3.467,69.356 3.721,69.415 3.979,69.457 4.239,69.483 4.485,69.491 4.5,69.49 78.269,69.558 78.284,69.559

## Other copper
Top Layer:
  rectangle net GND: 48.65,34.4 50,36
  rectangle net GND: 38.55,31.65 39.1,32.35
  rectangle net GND: 39.486,31.35 40.05,31.978
  rectangle net GND: 38.766,31.267 39.686,32.364
  rectangle net GND: 42.65,30.792 44.45,32.035
  rectangle net GND: 44.4,31.842 47.115,32.026
  rectangle net GND: 39.111,33.386 39.686,33.778
  rectangle net GND: 37.3,30.25 37.95,30.7
  rectangle net GND: 46.65,39.45 47.35,40.35
  rectangle net GND: 10.65,46.15 12.05,47.35
  rectangle net GND: 10.95,36 12.35,37.2
  rectangle net GND: 11.05,25.65 12.45,26.85
  rectangle net GND: 70.25,41.9 71.65,43.1
  rectangle net GND: 46.55,41.942 47.436,44.4
  rectangle net GND: 35,31.75 38.75,33.55
  rectangle net GND: 37.3,30.7 38.15,34.842
  rectangle net GND: 44.5,33.25 46.933,33.548
  rectangle net GND: 44.4,32.026 47.532,32.55
  rectangle net GND: 36,33.2 39.366,33.548
  rectangle net GND: 35.984,32.2 39.35,32.548
  rectangle net GND: 44.994,33.724 45.408,34.635
  rectangle net GND: 46.041,33.702 46.455,34.613
  region net GND: 47.532,32.55 47.642,32.55 47.749,32.443 47.532,32.178
  region net GND: 46.933,33.25 47,33.25 47.144,33.394 47.144,33.906 46.822,33.906 46.786,33.942
  region net GND: 44.35,33.75 44.35,33.25 44.9,33.25 44.95,33.3
  region net GND: 39.366,33.2 39.55,33.25 39.686,33.386 39.686,33.72 39.15,33.75
  region net GND: 39.35,32.548 39.55,32.5 39.686,32.364 39.686,32.064 39.286,31.892

## Silkscreen, mask and mechanical layers (free items; w line width, h text height)
Top Overlay:
  text "1.5-6GHz Wideband downconverter" at 20.5,66.5 h3
  text "Bertold Van den Bergh" at 8.55,1 h3
  text "Sofie Pollin" at 60.65,1 h3